# Altium PCB new.PcbDoc
Units mm, origin at the board's own origin, x right, y up, seen from the top; angles counter-clockwise.
Board outline 78.9 x 78.9 mm, 2 copper layers (Top Layer, Bottom Layer); 68 components, 65 nets, 212 pads, 2 vias.
Unrouted connection lines stored in the file: 80.
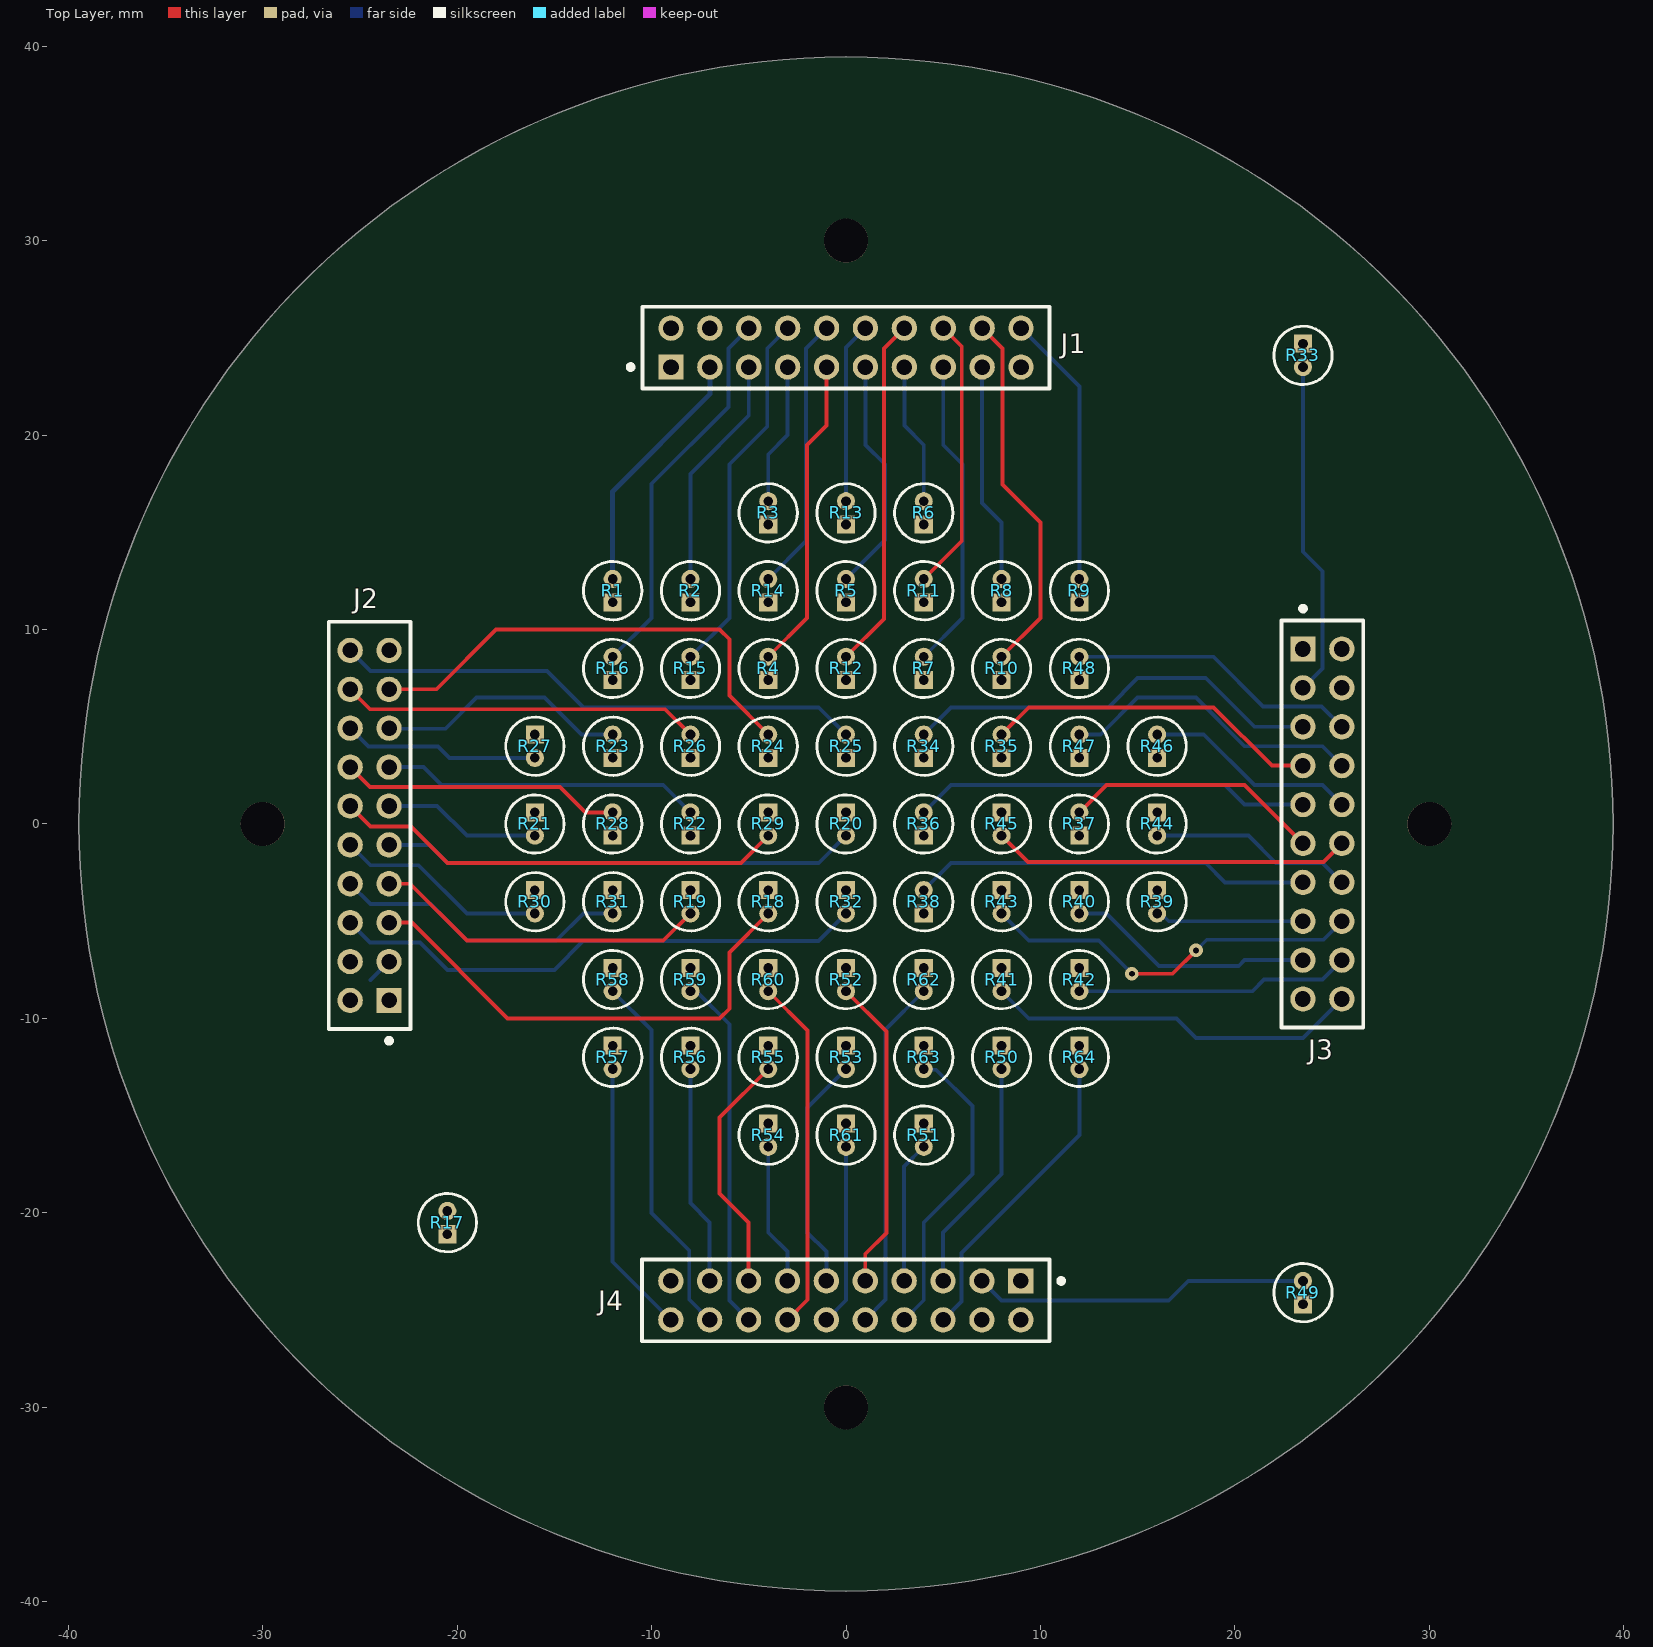
[diagram p0: Top Layer view]
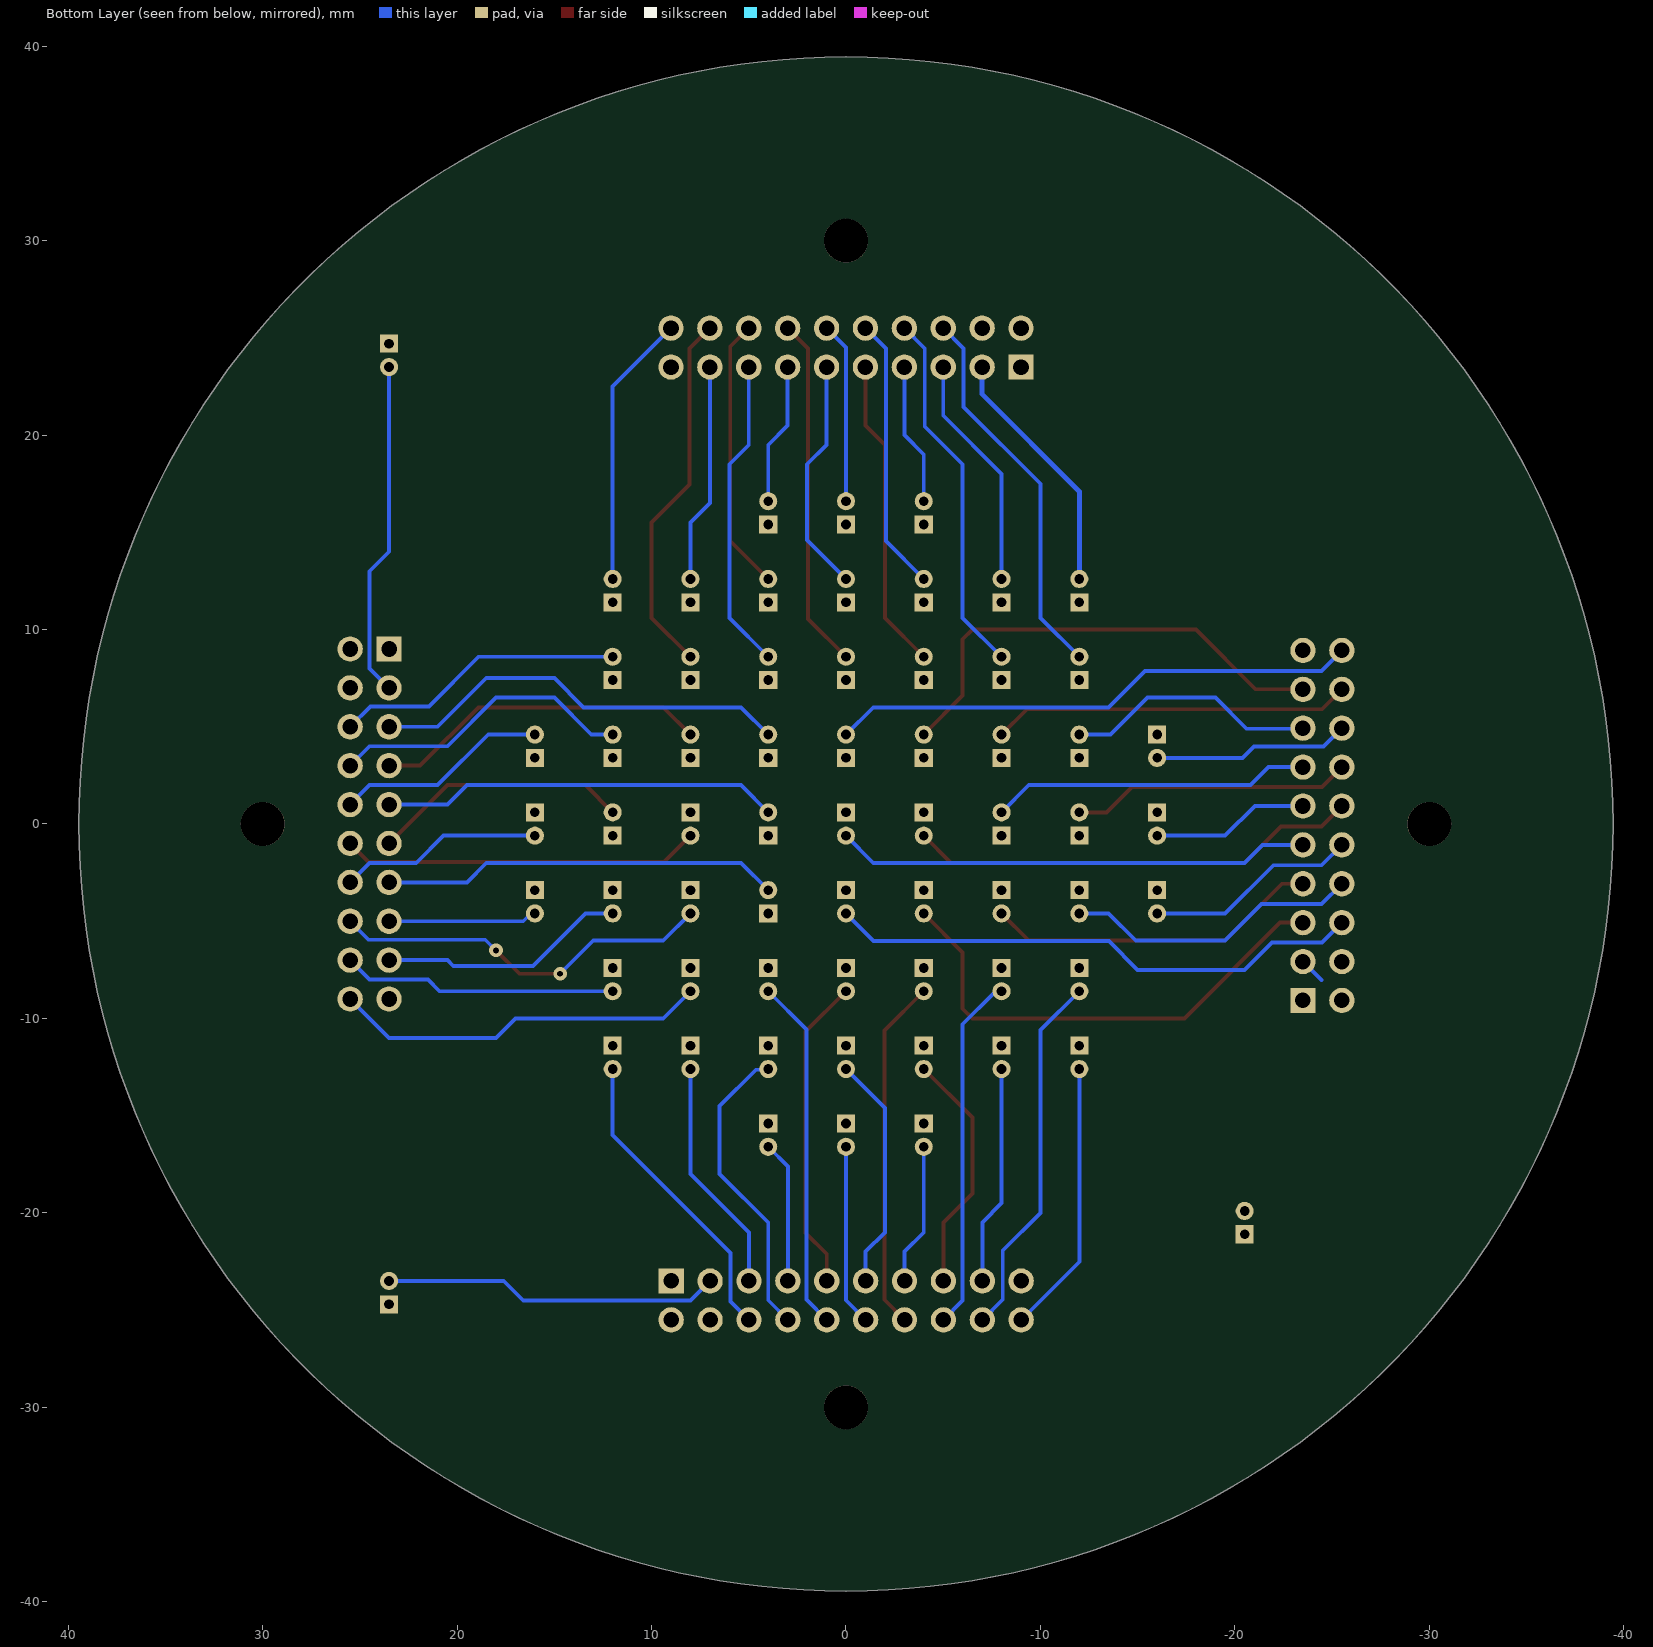
[diagram p1: Bottom Layer view, seen from below]
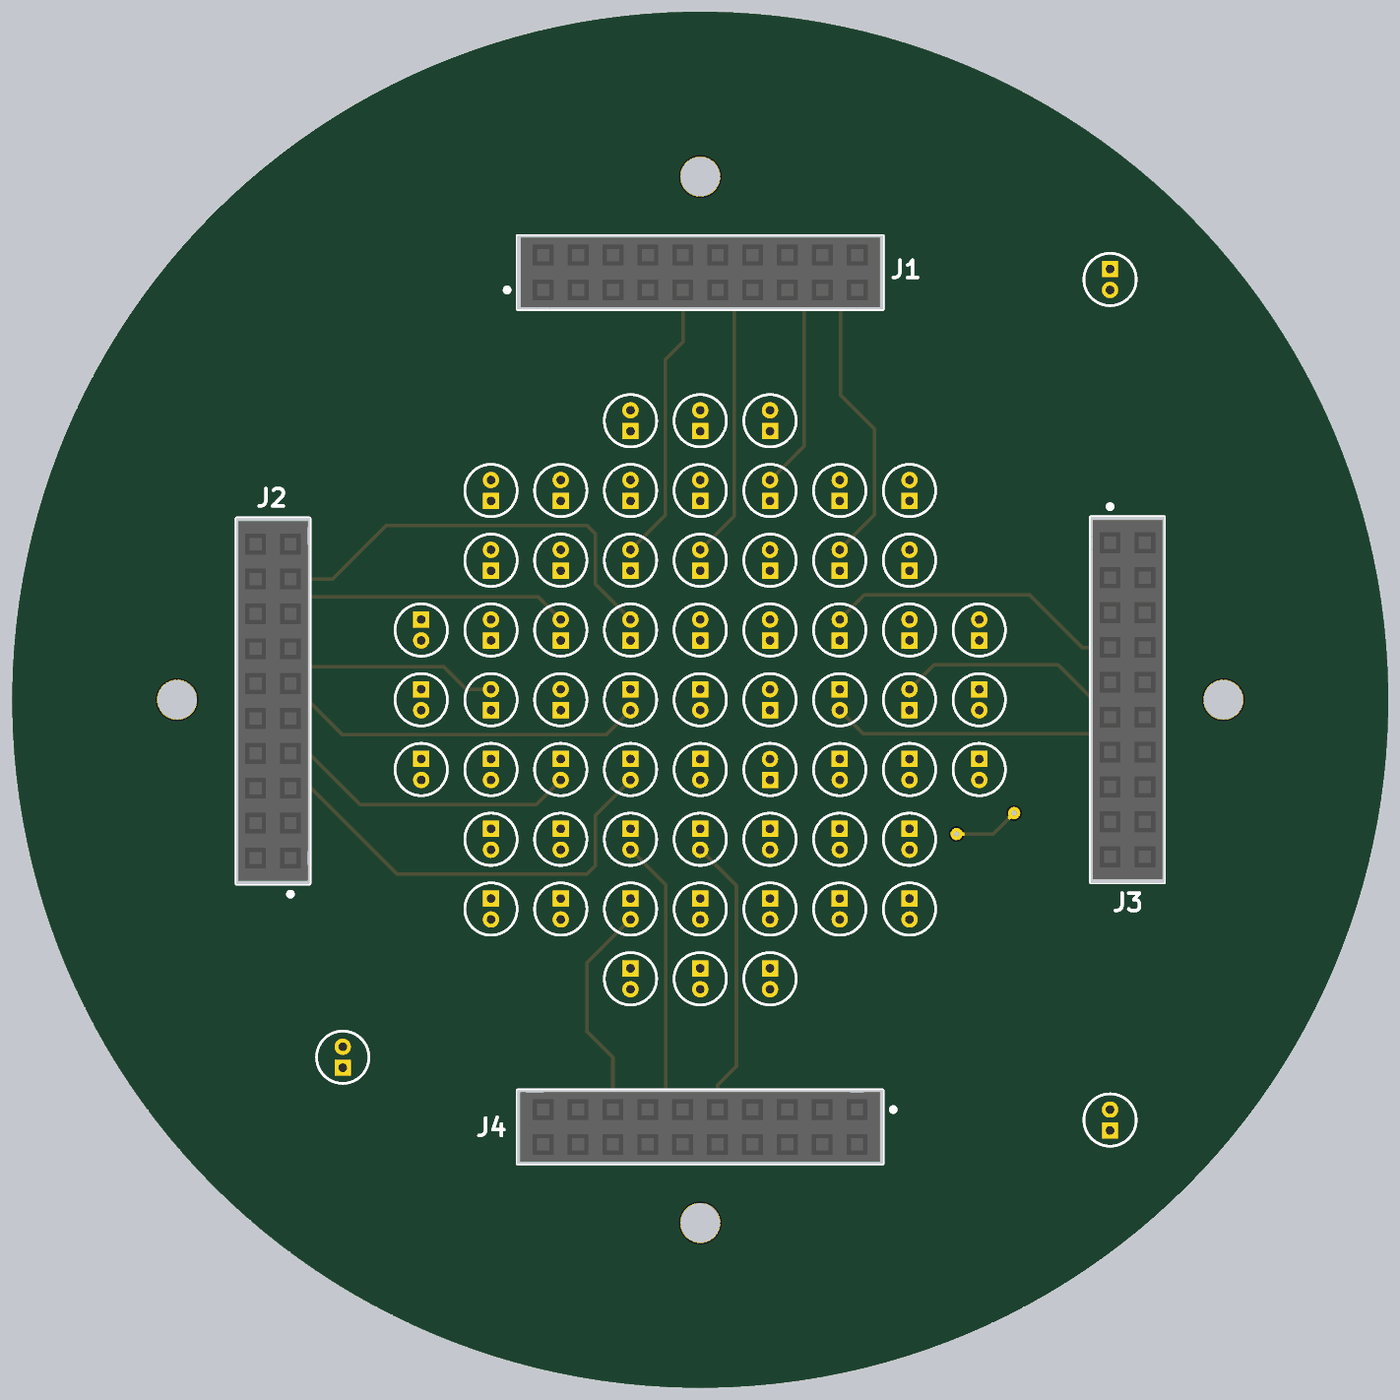
[diagram p2: 3D render of the assembled board from above, using the file's embedded part models]

## Layer stack, top to bottom
Top Solder: solder mask 0.0102, Solder Resist, Dk 3.5
Top Layer: signal copper 0.0356
Dielectric 1: dielectric 0.32, FR-4, Dk 4.8
Bottom Layer: signal copper 0.0356
Bottom Solder: solder mask 0.0102, Solder Resist, Dk 3.5

## Board outline
0,-39.45 cw(c0,0) -39.45,0 cw(c0,0) 0,39.45 cw(c0,0) 39.45,0 cw(c0,0)

## Design rules (kind name [scope] priority, off if disabled: settings)
BoardOutlineClearance [All] p1: gap=0.2 ignorepadtopadclearanceinfootprint=FALSE
Clearance [All] p1: gap=0.2 ignorepadtopadclearanceinfootprint=FALSE except(0.127: Arc-Arc Arc-Track Track-Track)
DiffPairsRouting [All] p1: maxlimit=0.254 minlimit=0.254 mostfreqgap=0.254 toplayer_minwidth=0.2 toplayer_maxwidth=0.5 toplayer_prefwidth=0.3 bottomlayer_minwidth=0.2 bottomlayer_maxwidth=0.5 bottomlayer_prefwidth=0.3 maxuncoupledlength=12.7
HoleSize [All] p1: absolutevalues=TRUE maxlimit=2.54 minlimit=0.2 maxpercent=80.000 minpercent=20.000
HoleToHoleClearance [All] p1: gap=0.5 allowstackedmicrovias=TRUE
MinimumAnnularRing [All] p1: minimumring=0.15
PolygonConnect [All] p1: connectstyle=Relief reliefconductorwidth=0.254 reliefentries=4 polygonreliefangle="90 Angle" airgapwidth=0.254
RoutingVias [All] p1: holewidth=0.3 width=0.7 viastyle="Through Hole" minholewidth=0.2 minwidth=0.5 maxholewidth=0.5 maxwidth=0.9
SolderMaskExpansion [All] p1: expansion=0.102 istentingtop=FALSE
UnRoutedNet [All] p1: checkbadconnections=TRUE
Width [All] p1: maxlimit=0.5 minlimit=0.2 preferedwidth=0.3
26 further rules are at their usual default settings.

## Components (designator, comment, footprint, x,y, rotation, side; value= is the part's Value field where it differs from the comment)
J1 "NPPN102AFCN-RC" "Header Connector 20 Pos 0.079\" (2.00mm) - A" 0,24.5 r0 top
J2 "NPPN102AFCN-RC" "Header Connector 20 Pos 0.079\" (2.00mm) - A" -24.5,-0.073 r90 top
J3 "NPPN102AFCN-RC" "Header Connector 20 Pos 0.079\" (2.00mm) - A" 24.5,0 r270 top
J4 "NPPN102AFCN-RC" "Header Connector 20 Pos 0.079\" (2.00mm) - A" -0.01,-24.5 r180 top
R1 "NTCLE413E2103F524A" "Thermistors NTC 10K 1% Bead - A" -12,12 r90 top value=10K
R2 "NTCLE413E2103F524A" "Thermistors NTC 10K 1% Bead - A" -8,12 r90 top
R3 "NTCLE413E2103F524A" "Thermistors NTC 10K 1% Bead - A" -4,16 r90 top value=10K
R4 "NTCLE413E2103F524A" "Thermistors NTC 10K 1% Bead - A" -4,8 r90 top value=10K
R5 "NTCLE413E2103F524A" "Thermistors NTC 10K 1% Bead - A" 0,12 r90 top value=10K
R6 "NTCLE413E2103F524A" "Thermistors NTC 10K 1% Bead - A" 4,16 r90 top value=10K
R7 "NTCLE413E2103F524A" "Thermistors NTC 10K 1% Bead - A" 4,8 r90 top value=10K
R8 "NTCLE413E2103F524A" "Thermistors NTC 10K 1% Bead - A" 8,12 r90 top value=10K
R9 "NTCLE413E2103F524A" "Thermistors NTC 10K 1% Bead - A" 12,12 r90 top value=10K
R10 "NTCLE413E2103F524A" "Thermistors NTC 10K 1% Bead - A" 8,8 r90 top value=10K
R11 "NTCLE413E2103F524A" "Thermistors NTC 10K 1% Bead - A" 4,12 r90 top value=10K
R12 "NTCLE413E2103F524A" "Thermistors NTC 10K 1% Bead - A" 0,8 r90 top value=10K
R13 "NTCLE413E2103F524A" "Thermistors NTC 10K 1% Bead - A" 0,16 r90 top value=10K
R14 "NTCLE413E2103F524A" "Thermistors NTC 10K 1% Bead - A" -4,12 r90 top value=10K
R15 "NTCLE413E2103F524A" "Thermistors NTC 10K 1% Bead - A" -8,8 r90 top
R16 "NTCLE413E2103F524A" "Thermistors NTC 10K 1% Bead - A" -12,8 r90 top value=10K
R17 "NTCLE413E2103F524A" "Thermistors NTC 10K 1% Bead - A" -20.5,-20.5 r90 top value=10K
R18 "NTCLE413E2103F524A" "Thermistors NTC 10K 1% Bead - A" -4,-4 r270 top
R19 "NTCLE413E2103F524A" "Thermistors NTC 10K 1% Bead - A" -8,-4 r270 top value=10K
R20 "NTCLE413E2103F524A" "Thermistors NTC 10K 1% Bead - A" 0,0 r270 top value=10K
R21 "NTCLE413E2103F524A" "Thermistors NTC 10K 1% Bead - A" -16,0 r270 top value=10K
R22 "NTCLE413E2103F524A" "Thermistors NTC 10K 1% Bead - A" -8,0 r90 top value=10K
R23 "NTCLE413E2103F524A" "Thermistors NTC 10K 1% Bead - A" -12,4 r90 top value=10K
R24 "NTCLE413E2103F524A" "Thermistors NTC 10K 1% Bead - A" -4,4 r90 top value=10K
R25 "NTCLE413E2103F524A" "Thermistors NTC 10K 1% Bead - A" 0,4 r90 top value=10K
R26 "NTCLE413E2103F524A" "Thermistors NTC 10K 1% Bead - A" -8,4 r90 top value=10K
R27 "NTCLE413E2103F524A" "Thermistors NTC 10K 1% Bead - A" -16,4 r270 top value=10K
R28 "NTCLE413E2103F524A" "Thermistors NTC 10K 1% Bead - A" -12,0 r90 top value=10K
R29 "NTCLE413E2103F524A" "Thermistors NTC 10K 1% Bead - A" -4,0 r270 top value=10K
R30 "NTCLE413E2103F524A" "Thermistors NTC 10K 1% Bead - A" -16,-4 r270 top value=10K
R31 "NTCLE413E2103F524A" "Thermistors NTC 10K 1% Bead - A" -12,-4 r270 top
R32 "NTCLE413E2103F524A" "Thermistors NTC 10K 1% Bead - A" 0,-4 r270 top value=10K
R33 "NTCLE413E2103F524A" "Thermistors NTC 10K 1% Bead - A" 23.5,24.1 r270 top value=10K
R34 "NTCLE413E2103F524A" "Thermistors NTC 10K 1% Bead - A" 4,4 r90 top
R35 "NTCLE413E2103F524A" "Thermistors NTC 10K 1% Bead - A" 8,4 r90 top value=10K
R36 "NTCLE413E2103F524A" "Thermistors NTC 10K 1% Bead - A" 4,0 r90 top value=10K
R37 "NTCLE413E2103F524A" "Thermistors NTC 10K 1% Bead - A" 12,0 r90 top value=10K
R38 "NTCLE413E2103F524A" "Thermistors NTC 10K 1% Bead - A" 4,-4 r90 top value=10K
R39 "NTCLE413E2103F524A" "Thermistors NTC 10K 1% Bead - A" 16,-4 r270 top value=10K
R40 "NTCLE413E2103F524A" "Thermistors NTC 10K 1% Bead - A" 12,-4 r270 top value=10K
R41 "NTCLE413E2103F524A" "Thermistors NTC 10K 1% Bead - A" 8,-8 r270 top value=10K
R42 "NTCLE413E2103F524A" "Thermistors NTC 10K 1% Bead - A" 12,-8 r270 top value=10K
R43 "NTCLE413E2103F524A" "Thermistors NTC 10K 1% Bead - A" 8,-4 r270 top value=10K
R44 "NTCLE413E2103F524A" "Thermistors NTC 10K 1% Bead - A" 16,0 r270 top value=10K
R45 "NTCLE413E2103F524A" "Thermistors NTC 10K 1% Bead - A" 8,0 r270 top value=10K
R46 "NTCLE413E2103F524A" "Thermistors NTC 10K 1% Bead - A" 16,4 r90 top value=10K
R47 "NTCLE413E2103F524A" "Thermistors NTC 10K 1% Bead - A" 12,4 r90 top
R48 "NTCLE413E2103F524A" "Thermistors NTC 10K 1% Bead - A" 12,8 r90 top value=10K
R49 "NTCLE413E2103F524A" "Thermistors NTC 10K 1% Bead - A" 23.5,-24.1 r90 top value=10K
R50 "NTCLE413E2103F524A" "Thermistors NTC 10K 1% Bead - A" 8,-12 r270 top
R51 "NTCLE413E2103F524A" "Thermistors NTC 10K 1% Bead - A" 4,-16 r270 top value=10K
R52 "NTCLE413E2103F524A" "Thermistors NTC 10K 1% Bead - A" 0,-8 r270 top value=10K
R53 "NTCLE413E2103F524A" "Thermistors NTC 10K 1% Bead - A" 0,-12 r270 top value=10K
R54 "NTCLE413E2103F524A" "Thermistors NTC 10K 1% Bead - A" -4,-16 r270 top value=10K
R55 "NTCLE413E2103F524A" "Thermistors NTC 10K 1% Bead - A" -4,-12 r270 top value=10K
R56 "NTCLE413E2103F524A" "Thermistors NTC 10K 1% Bead - A" -8,-12 r270 top value=10K
R57 "NTCLE413E2103F524A" "Thermistors NTC 10K 1% Bead - A" -12,-12 r270 top value=10K
R58 "NTCLE413E2103F524A" "Thermistors NTC 10K 1% Bead - A" -12,-8 r270 top value=10K
R59 "NTCLE413E2103F524A" "Thermistors NTC 10K 1% Bead - A" -8,-8 r270 top value=10K
R60 "NTCLE413E2103F524A" "Thermistors NTC 10K 1% Bead - A" -4,-8 r270 top value=10K
R61 "NTCLE413E2103F524A" "Thermistors NTC 10K 1% Bead - A" 0,-16 r270 top value=10K
R62 "NTCLE413E2103F524A" "Thermistors NTC 10K 1% Bead - A" 4,-8 r270 top value=10K
R63 "NTCLE413E2103F524A" "Thermistors NTC 10K 1% Bead - A" 4,-12 r270 top
R64 "NTCLE413E2103F524A" "Thermistors NTC 10K 1% Bead - A" 12,-12 r270 top value=10K

## Footprints (in the part's own frame and the unit in brackets; to place one, negate y for a bottom-side part, rotate by r counter-clockwise, add the part's x,y. Pads: shape width x height; smd on the part's side, far side on the other; paste and mask are expansions set on the pad)
"Header Connector 20 Pos 0.079\" (2.00mm) - A" [mm] "20 Position Header Connector 0.079\" (2.00mm) Through Hole Gold"
  rect 1.3x1.3 hole 0.8 paste-1000 mask+0: 1(-9,-1)
  round 1.3 hole 0.8 paste-1000 mask+0: 2(-7,-1) 3(-5,-1) 4(-3,-1) 5(-1,-1) 6(1,-1) 7(3,-1) 8(5,-1) 9(7,-1) 10(9,-1) 11(9,1) 12(7,1) 13(5,1) 14(3,1) 15(1,1) 16(-1,1) 17(-3,1) 18(-5,1) 19(-7,1) 20(-9,1)
  silkscreen extent -11.2,-2.1 10.48,2.1, body extent -10.58,-2.2 10.58,2.2, height 0.25
"Thermistors NTC 10K 1% Bead - A" [mm] "NTC Thermistor 10k Bead, Epoxy"
  rect 0.93x0.93 hole 0.5 paste-1000 mask+0: 1(-0.6,0)
  round 0.93 hole 0.5 paste-1000 mask+0: 2(0.6,0)
  silkscreen extent -1.5,-1.5 1.5,1.5, body extent -1.48,-1.5 1.48,1.5, height 1

## Part data
J1 J2 J3 J4: library part "Header Connector 20 Pos 0.079\" (2.00mm)", "20 Position Header Connector 0.079\" (2.00mm) Through Hole Gold", Supplier Part Number 1=S5750-10-ND, Supplier 1=Digi-Key
R1 R2 R3 R4 R5 R6 R7 R8 R9 R10 R11 R12 R13 R14 R15 R16 R17 R18 R19 R20 R21 R22 R23 R24 R25 R26 R27 R28 R29 R30 R31 R32 R33 R34 R35 R36 R37 R38 R39 R40 R41 R42 R43 R44 R45 R46 R47 R48 R49 R50 R51 R52 R53 R54 R55 R56 R57 R58 R59 R60 R61 R62 R63 R64: library part "Thermistors NTC 10K 1% Bead", "NTC Thermistor 10k Bead, Epoxy", Supplier Part Number 1=56-NTCLE413E2103F524A-ND, ComponentLink1Description=Datasheet, ComponentLink1URL=https://www.vishay.com/docs/29078/ntcle413.pdf, Supplier 1=Digi-Key

## Free pads (board coordinates)
  round 2.261 hole 2.261: 1(-30,0) 1(0,-30) 1(0,30) 1(30,0)

## Via types
v1: diameter 0.7, hole 0.3, Top Layer to Bottom Layer, 2 vias

## Nets (pads, with @x,y where several pads share a name; then routed paths per layer and width w, separated by ;. In a path a pad name is that pad's centre, name@x,y a point inside that pad or via, vN(x,y) a via of type N, cw(c..) or ccw(c..) an arc to the next point about the centre after c; other vN are vias at no path point)
A1: J1.2 R1.2 | length 13
  Bottom Layer w0.254: R1.2 -12,17.1 -7,22.1 J1.2
A2: J1.3 R2.2 | length 12.1
  Bottom Layer w0.2: R2.2 -8,18 -5,21 J1.3
A3: J1.4 R3.2 | length 7.3
  Bottom Layer w0.2: R3.2 -4,19 -3,20 J1.4
A4: J1.5 R4.2 | length 16.1
  Top Layer w0.2: R4.2 -2,10.6 -2,19.5 -1,20.5 J1.5
A5: J1.6 R5.2 | length 12.1
  Bottom Layer w0.2: R5.2 2,14.6 2,18.5 1,19.5 J1.6
A6: J1.7 R6.2 | length 7.3
  Bottom Layer w0.2: J1.7 3,20.5 4,19.5 R6.2
A7: J1.8 R7.2 | length 16.1
  Bottom Layer w0.2: R7.2 6,10.6 6,18.5 5,19.5 J1.8
A8: J1.9 R8.2 | length 11.3
  Bottom Layer w0.2: J1.9 7,16.5 8,15.5 R8.2
A10: J1.11 R9.2 | length 14.1
  Bottom Layer w0.2: J1.11 12,22.5 R9.2
A11: J1.12 R10.2 | length 19
  Top Layer w0.2: J1.12 8.05,24.45 8.05,17.45 10,15.5 10,10.6 R10.2
A12: J1.13 R11.2 | length 14.1
  Top Layer w0.2: R11.2 5.95,14.55 5.95,24.55 J1.13
A13: J1.14 R12.2 | length 18.1
  Top Layer w0.2: R12.2 1.95,10.55 1.95,24.45 J1.14
A14: J1.15 R13.2 | length 9.3
  Bottom Layer w0.2: R13.2 0,24.5 J1.15
A15: J1.16 R14.2 | length 14.1
  Bottom Layer w0.2: R14.2 -2.05,14.55 -2.05,24.45 J1.16
A16: J1.17 R15.2 | length 19
  Bottom Layer w0.2: R15.2 -6,10.6 -6,18.5 -4.05,20.45 -4.05,24.45 J1.17
A17: J1.18 R16.2 | length 19.8
  Bottom Layer w0.2: R16.2 -10,10.6 -10,17.5 -6.05,21.45 -6.05,24.45 J1.18
B1: J2.2 R17.2 | length 1.3
  Bottom Layer w0.2: -24.45,-8.023 J2.2
B2: J2.3 R18.2 | length 25.5
  Top Layer w0.2: J2.3 -22.327,-5.073 -17.4,-10 -6.5,-10 -6,-9.5 -6,-6.6 R18.2
B3: J2.4 R19.2 | length 17.3
  Top Layer w0.2: J2.4 -22.427,-3.073 -19.5,-6 -9.4,-6 R19.2
B4: J2.5 R20.2 | length 24.5
  Bottom Layer w0.2: J2.5 -21.427,-1.073 -20.5,-2 -1.4,-2 R20.2
B5: J2.6 R21.2 | length 8.1
  Bottom Layer w0.2: J2.6 -21.027,0.927 -19.5,-0.6 R21.2
B6: J2.7 R22.2 | length 16.5
  Bottom Layer w0.2: J2.7 -21.727,2.927 -20.8,2 -9.4,2 R22.2
B7: J2.8 R23.2 | length 13
  Bottom Layer w0.2: J2.8 -23.473,4.9 -20.6,4.9 -19,6.5 -15.5,6.5 -13.6,4.6 R23.2
B8: J2.9 R24.2 | length 24.7
  Top Layer w0.2: J2.9 -21.073,6.927 -18,10 -6.5,10 -6,9.5 -6,6.6 R24.2
B10: J2.11 R25.2 | length 27.3
  Bottom Layer w0.2: J2.11 -24.45,7.877 -15.377,7.877 -13.5,6 -1.4,6 R25.2
B11: J2.12 R26.2 | length 18.5
  Top Layer w0.2: J2.12 -24.473,5.9 -9.3,5.9 R26.2
B12: J2.13 R27.2 | length 10.1
  Bottom Layer w0.2: J2.13 -24.55,3.977 -20.977,3.977 -20.4,3.4 R27.2
B13: J2.14 R28.2 | length 14.5
  Top Layer w0.2: J2.14 -24.473,1.9 -14.7,1.9 -13.4,0.6 R28.2
B14: J2.15 R29.2 | length 23.3
  Top Layer w0.2: J2.15 -24.45,-0.123 -22.377,-0.123 -20.5,-2 -5.4,-2 R29.2
B15: J2.16 R30.2 | length 11
  Bottom Layer w0.2: J2.16 -24.45,-2.123 -21.977,-2.123 -19.5,-4.6 R30.2
B16: J2.17 R31.2 | length 15.3
  Bottom Layer w0.2: J2.17 -24.45,-4.123 -21.377,-4.123 -19.5,-6 -14.9,-6 -13.5,-4.6 R31.2
B17: J2.18 R32.2 | length 27.7
  Bottom Layer w0.2: J2.18 -24.473,-6.1 -21.9,-6.1 -20.5,-7.5 -15,-7.5 -13.523,-6.023 -1.423,-6.023 R32.2
C1: J3.2 R33.2 | length 17.3
  Bottom Layer w0.2: J3.2 24.5,8 24.5,13 23.5,14 R33.2
C2: J3.3 R34.2 | length 21.7
  Bottom Layer w0.2: R34.2 5.4,6 13.5,6 15,7.5 18.5,7.5 21,5 J3.3
C3: J3.4 R35.2 | length 17.3
  Top Layer w0.2: R35.2 9.4,6 18.9,6 21.9,3 J3.4
C4: J3.5 R36.2 | length 20.5
  Bottom Layer w0.2: R36.2 5.4,2 19.5,2 20.5,1 J3.5
C5: J3.6 R37.2 | length 13.3
  Top Layer w0.2: R37.2 13.4,2 20.5,2 J3.6
C6: J3.7 R38.2 | length 20.5
  Bottom Layer w0.2: R38.2 5.4,-2 18.5,-2 19.5,-3 J3.7
C7: J3.8 R39.2 | length 7.7
  Bottom Layer w0.2: R39.2 16.198,-4.6 16.598,-5 J3.8
C8: J3.9 R40.2 | length 12.7
  Bottom Layer w0.2: R40.2 13.4,-4.6 16.1,-7.3 20.2,-7.3 20.5,-7 J3.9
C10: J3.11 R41.2 | length 19.3
  Bottom Layer w0.2: R41.2 9.4,-10 17,-10 18,-11 23.5,-11 J3.11
C11: J3.12 R42.2 | length 14.2
  Bottom Layer w0.2: R42.2 20.9,-8.6 21.5,-8 24.5,-8 J3.12
C12: J3.13 R43.2 | length 19.9
  Top Layer w0.2: v1(14.7,-7.7) 16.8,-7.7 v1(18,-6.5)
  Bottom Layer w0.2: R43.2 9.4,-6 13,-6 v1(14.7,-7.7) ; v1(18,-6.5) 18.55,-5.95 24.55,-5.95 J3.13
C13: J3.14 R44.2 | length 10.5
  Bottom Layer w0.2: R44.2 20.7,-0.6 22.1,-2 24.5,-2 J3.14
C14: J3.15 R45.2 | length 18.5
  Top Layer w0.2: R45.2 9.35,-1.95 24.55,-1.95 J3.15
C15: J3.16 R46.2 | length 11
  Bottom Layer w0.2: R46.2 18.4,4.6 21,2 24.5,2 J3.16
C16: J3.17 R47.2 | length 15.7
  Bottom Layer w0.2: R47.2 13.1,4.6 15,6.5 18,6.5 20.5,4 24.5,4 J3.17
C17: J3.18 R48.2 | length 15
  Bottom Layer w0.2: R48.2 18.9,8.6 21.45,6.05 24.45,6.05 J3.18
D1: J4.2 R49.2 | length 17.3
  Bottom Layer w0.2: J4.2 7.99,-24.5 16.6,-24.5 17.6,-23.5 R49.2
D2: J4.3 R50.2 | length 12.1
  Bottom Layer w0.2: J4.3 4.99,-21.01 8,-18 R50.2
D3: J4.4 R51.2 | length 7.3
  Bottom Layer w0.2: J4.4 2.99,-17.61 R51.2
D4: J4.5 R52.2 | length 16.2
  Top Layer w0.2: R52.2 2.075,-10.675 2.075,-21.025 0.99,-22.11 J4.5
D5: J4.6 R53.2 | length 12.1
  Bottom Layer w0.2: J4.6 -1.01,-21.99 -2,-21 -2,-14.6 R53.2
D6: J4.7 R54.2 | length 7.3
  Bottom Layer w0.2: R54.2 -4,-21 -3.01,-21.99 J4.7
D7: J4.8 R55.2 | length 12.6
  Top Layer w0.2: J4.8 -5.01,-20.49 -6.5,-19 -6.5,-15.1 R55.2
D8: J4.9 R56.2 | length 11.3
  Bottom Layer w0.2: R56.2 -8,-19.5 -7.01,-20.49 J4.9
D10: J4.11 R57.2 | length 14.1
  Bottom Layer w0.2: R57.2 -12,-22.51 J4.11
D11: J4.12 R58.2 | length 19
  Bottom Layer w0.2: R58.2 -10,-10.6 -10,-20 -8.06,-21.94 -8.06,-24.45 J4.12
D12: J4.13 R59.2 | length 18.3
  Bottom Layer w0.2: R59.2 -7.86,-8.74 -7.56,-8.74 -6,-10.3 -6,-24.51 J4.13
D13: J4.14 R60.2 | length 18.2
  Top Layer w0.2: R60.2 -1.975,-10.625 -1.975,-24.465 J4.14
D14: J4.15 R61.2 | length 9.3
  Bottom Layer w0.2: J4.15 0,-24.49 R61.2
D15: J4.16 R62.2 | length 18.1
  Bottom Layer w0.2: J4.16 2.04,-24.45 2.04,-10.56 R62.2
D16: J4.17 R63.2 | length 15.7
  Bottom Layer w0.2: J4.17 4,-24.49 4,-20.5 6.5,-18 6.5,-14.5 4.641,-12.641 4.041,-12.641 R63.2
D17: J4.18 R64.2 | length 15.8
  Bottom Layer w0.2: J4.18 5.94,-24.55 5.94,-22.06 12,-16 R64.2
GND: J1.1 J1.10 J1.19 J1.20 J2.1 J2.10 J2.19 J2.20 J3.1 J3.10 J3.19 J3.20 J4.1 J4.10 J4.19 J4.20 R1.1 R2.1 R3.1 R4.1 R5.1 R6.1 R7.1 R8.1 R9.1 R10.1 R11.1 R12.1 R13.1 R14.1 R15.1 R16.1 R17.1 R18.1 R19.1 R20.1 R21.1 R22.1 R23.1 R24.1 R25.1 R26.1 R27.1 R28.1 R29.1 R30.1 R31.1 R32.1 R33.1 R34.1 R35.1 R36.1 R37.1 R38.1 R39.1 R40.1 R41.1 R42.1 R43.1 R44.1 R45.1 R46.1 R47.1 R48.1 R49.1 R50.1 R51.1 R52.1 R53.1 R54.1 R55.1 R56.1 R57.1 R58.1 R59.1 R60.1 R61.1 R62.1 R63.1 R64.1